# EAGLE board LNA_V4 (EAGLE 7.5.0)
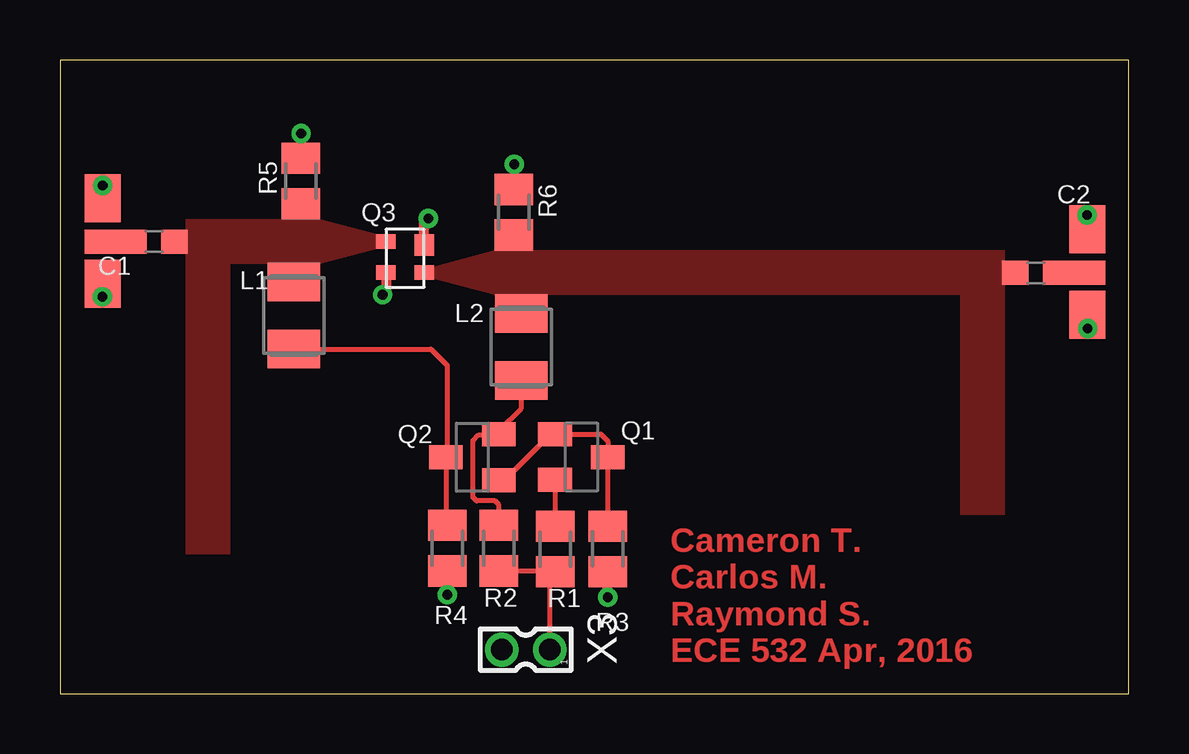
[diagram p0: board, top side]
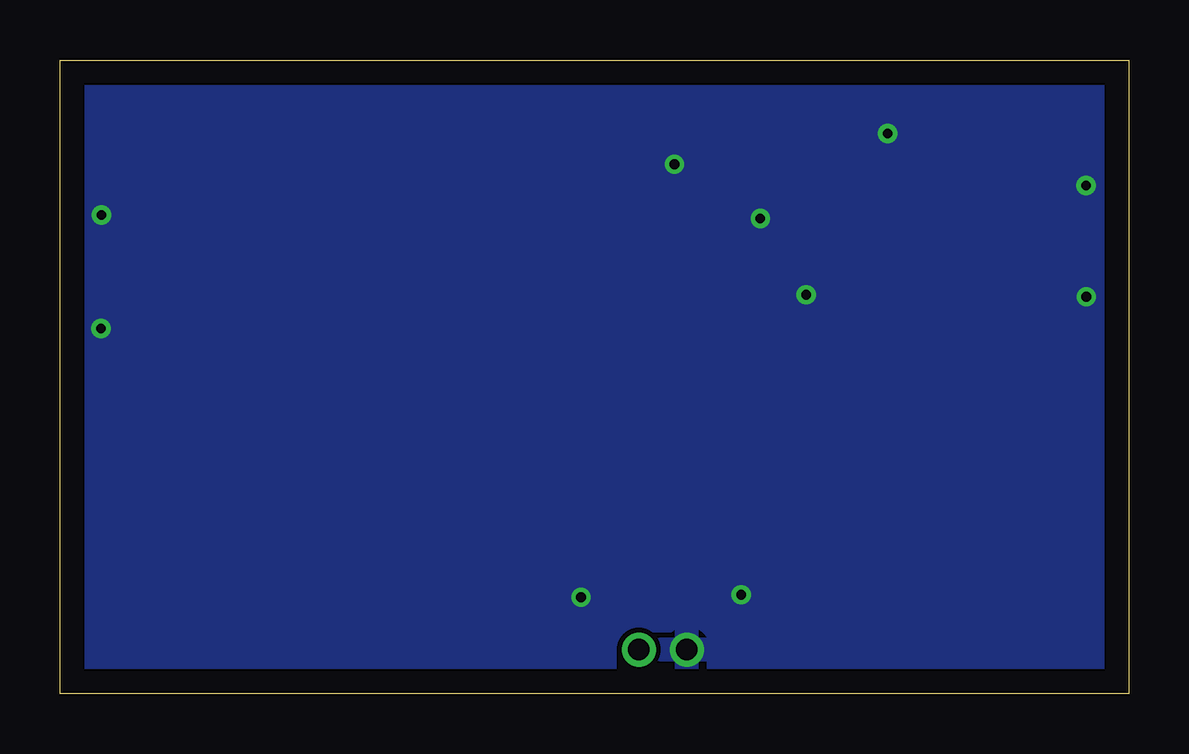
[diagram p1: board, bottom side, seen from below]

Size 44.55 x 26.4 mm. Coordinates in mm from the lower left corner, seen from the top.
Outline: 0,0 44.55,0 44.55,26.4 0,26.4 0,0
Copper layers (1*16): Top 0.035mm / dielectric 1.5mm / Bottom 0.035mm
Design rules "default": minimum track width 10mil, minimum drill 24mil, track to track 8mil, track to pad 8mil, pad to pad 8mil, via to via 8mil, smd to smd 8mil, copper to edge 40mil, drill to drill 8mil, minimum pad ring 10mil, minimum via ring 8mil, stop-mask expansion 4mil, vias tented up to drill 0mil, thermal gap 10mil

## Footprints (pad centres in the part's own frame; a part is rotated, then mirrored left to right if it is on the bottom)
C0603 = smd 1.1 x 1: 1 -0.85,0; 2 0.85,0
L3225M = smd 1.6 x 2.2: 1 -1.4,0; 2 1.4,0
SOT23-BEC = smd 1 x 1.4: B -0.95,-1.1; C 0,1.1; E 0.95,-1.1
SOT-343 = smd 0.6 x 0.8: 1 1.3,1.6; 3 0,0; 4 1.3,0 | smd 0.9 x 0.8: 2 0.15,1.6
M0805 = smd 1.3 x 1.6: 1 -0.95,0; 2 0.95,0
PROBE_LANDING = smd 1.5 x 2: 1 0,1.8; 3 0,-1.75 | smd 1.5 x 1: 2 0,0
332-02 = drill 0.9 pad 1.27: 1 0,-1; 2 0,1

## Placement (x,y rotation side)
C1  [C0603]  3.92,18.84 180 top
C2  [C0603]  40.67,17.54 180 top
L1  820nH  [L3225M]  9.75,15.75 90 top
L2  820nH  [L3225M]  19.23,14.44 90 top
Q1  MMBT3906LT1SMD  [SOT23-BEC]  21.74,9.86 270 top
Q2  MMBT3906LT1SMD  [SOT23-BEC]  17.18,9.85 90 top
Q3  SAV-541+  [SOT-343]  13.58,18.84 270 top
R1  3k  [M0805]  20.65,6.02 270 top
R2  15  [M0805]  18.3,6.06 270 top
R3  3k  [M0805]  22.84,6.03 270 top
R4  4320  [M0805]  16.15,6.06 270 top
R5  50  [M0805]  10.05,21.36 90 top
R6  100  [M0805]  18.92,20.06 90 top
X1  PROBE_LANDING  [PROBE_LANDING]  42.82,17.54 0 top
X2  PROBE_LANDING  [PROBE_LANDING]  1.77,18.84 0 top
X3  332-02  [332-02]  19.42,1.83 90 top

## Library data of the parts
C1 C2 R1-R6 = rcl
L1 L2 = resistor
Q1 Q2 = transistor-pnp
Q3 X1 X2 = ECE532_Parts
X3 = con-garry

## Nets
+3.3V: R1.2 R2.2 X3.1
GND: Q3.2 Q3.4 R3.2 R4.2 R5.2 R6.2 X1.1 X1.3 X2.1 X2.3 X3.2
INPUT: C1.1 L1.2 Q3.3 R5.1
ISO_INPUT: C1.2 X2.2
ISO_OUTPUT: C2.1
N$1: Q1.B Q1.C Q2.B R3.1
N$4: Q1.E R1.1
OUTPUT: C2.2 L2.2 Q3.1 R6.1
VD: L2.1 Q2.E R2.1
VG: L1.1 Q2.C R4.1

## Tracks (layer width: path | path; a pad name or v marks a point on that pad's centre or on a via)
+3.3V
  Top 0.203: R2.2 20.61,5.11 R1.2 20.42,4.84 X3.1
GND  (via drill 0.4)
  Top 0.203: v10.05,23.33 R5.2 | v18.93,22.06 18.93,21.05 R6.2
  Top 0.254: v42.82,19.94 X1.1 | v42.84,15.21 42.82,15.21 X1.3 | v1.77,16.54 X2.3 | 1.77,20.19 X2.1 v1.77,21.17 v1.78,21.17
  Top 0.406: Q3.2 15.18,19.62 v15.36,19.79 | Q3.4 13.58,16.75 v13.45,16.62 | v22.83,4.02 22.83,4.86 R3.2 | v16.15,4.12 R4.2
  pour Bottom: 53.53,-21.57 54.13,71.16 -7.05,71.86 -7.8,-21.17
INPUT
  pour Top (no thermals): 5.23,19.77 10.85,19.77 10.85,17.92 5.23,17.92
  pour Top (no thermals): 13.39,19.1 10.85,19.77 10.85,17.92 13.39,18.59
ISO_INPUT
  Top 0.203: X2.2 C1.2 | C1.2
N$1
  Top 0.203: Q2.B 18.54,8.9 20.13,10.49 20.32,10.49 Q1.B 22.55,10.81 22.83,10.52 Q1.C R3.1
N$4
  Top 0.203: Q1.E 20.64,6.99 R1.1
N$6
  pour Top (no thermals): 7.08,5.81 7.08,17.92 5.24,17.92 5.24,5.81
N$8
  pour Top (no thermals): 39.39,7.46 39.39,16.62 37.54,16.62 37.54,7.46
OUTPUT
  pour Top (no thermals): 18.12,16.61 39.39,16.61 39.39,18.46 18.12,18.46
  pour Top (no thermals): 15.58,17.29 18.12,16.62 18.12,18.46 15.58,17.79
VD
  Top 0.203: R2.1 18.3,7.86 18.13,8.03 17.37,8.03 17.21,8.18 17.21,10.54 17.45,10.78 18.27,10.78 Q2.E 18.28,10.95 19.23,11.9 L2.1
VG
  Top 0.203: L1.1 15.46,14.35 16.14,13.68 16.14,9.9 Q2.C 16.08,7.07 R4.1

## Text on the board
Top: Cameron T. / Carlos M. / Raymond S. / ECE 532 Apr, 2016